# EAGLE board SwitchV1 (EAGLE 9.4.2)
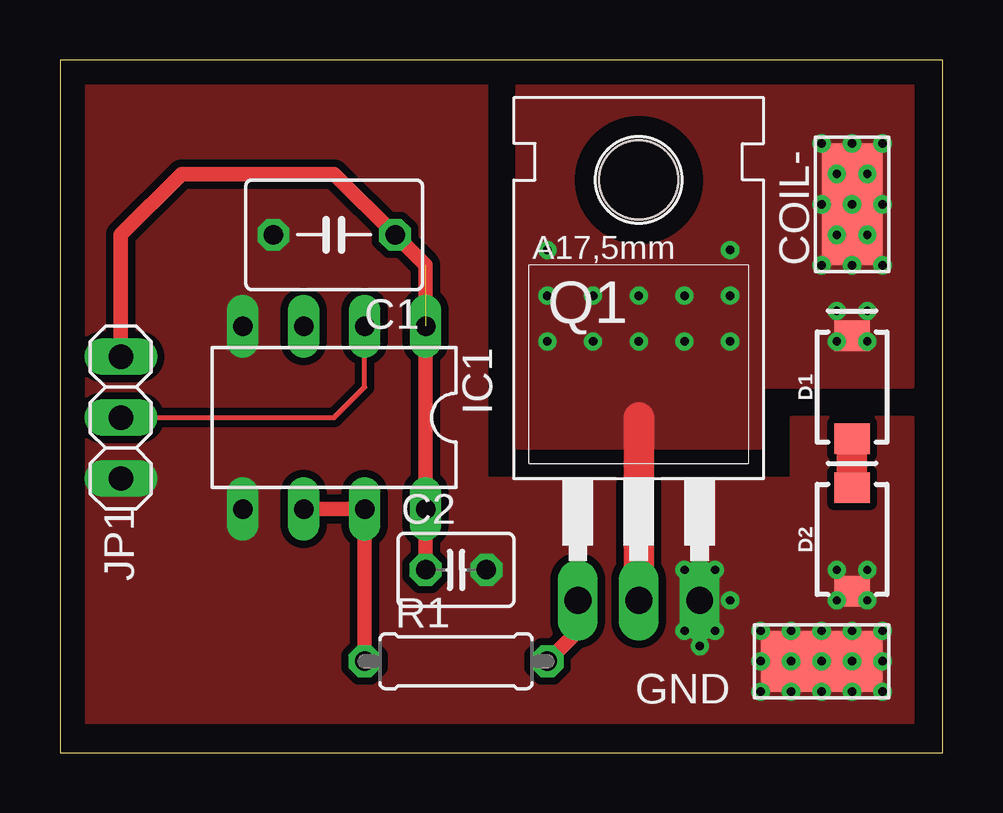
[diagram p0: board, top side]
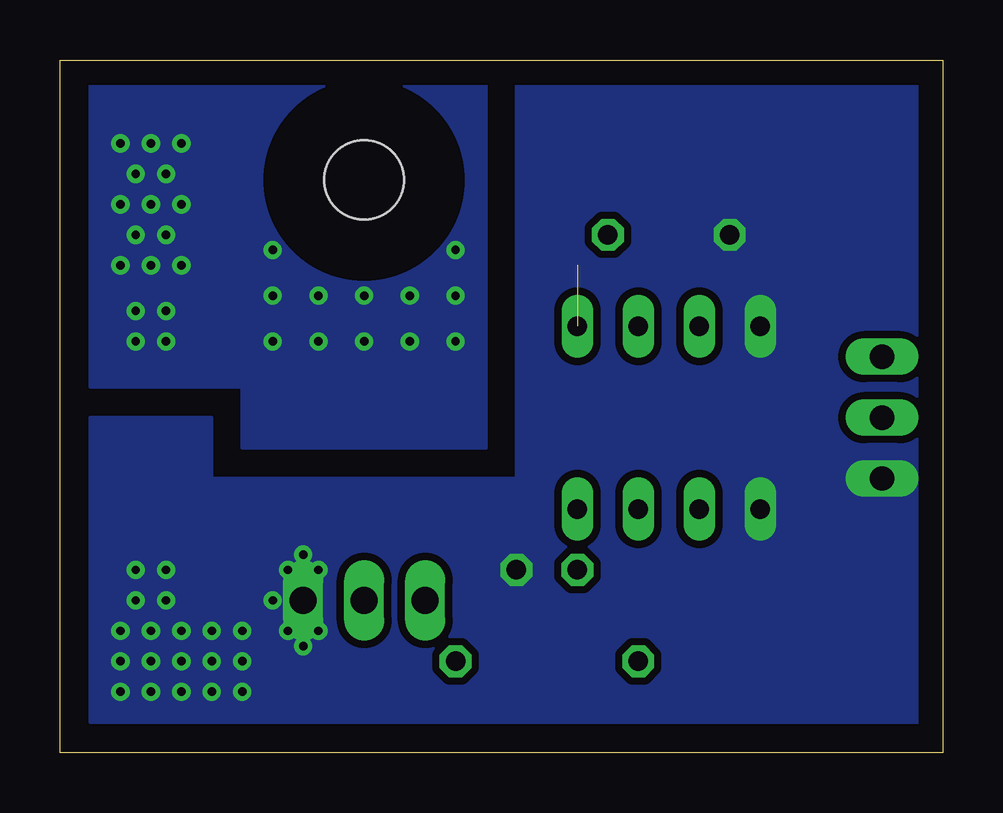
[diagram p1: board, bottom side, seen from below]

Size 36.81 x 28.88 mm. Coordinates in mm from the lower left corner, seen from the top.
Outline: 0,0 36.81,0 36.81,28.88 0,28.88 0,0
Copper layers (1*16): Top 0.035mm / dielectric 1.5mm / Bottom 0.035mm
Design rules "default *": minimum track width 6mil, minimum drill 0.35mm, track to track 12mil, track to pad 12mil, pad to pad 12mil, via to via 12mil, smd to smd 12mil, copper to edge 40mil, drill to drill 6mil, minimum pad ring 10mil, minimum via ring 8mil, stop-mask expansion 4mil, vias tented up to drill 0mil, thermal gap 10mil

## Footprints (pad centres in the part's own frame; a part is rotated, then mirrored left to right if it is on the bottom)
C050-045X075 = drill 0.813 octagon: 1 -2.54,0; 2 2.54,0
C025-030X050 = drill 0.813 octagon: 1 -1.27,0; 2 1.27,0
5-2,5 = smd 2.54 x 5.08: 1 0,0
SMA-DIODE = smd 1.27 x 1.47: A -2.15,0; C 2.15,0
DIL08 = drill 0.813 long: 1 -3.81,-3.81; 2 -1.27,-3.81; 3 1.27,-3.81; 4 3.81,-3.81; 5 3.81,3.81; 6 1.27,3.81; 7 -1.27,3.81; 8 -3.81,3.81
1X03 = drill 1.016 long: 1 -2.54,0; 2 0,0; 3 2.54,0
TO220 = drill 1.118 long: 1 -2.54,-6.35; 2 0,-6.35; 3 2.54,-6.35 | hole 3.302: 0,11.176
0207/7 = drill 0.813 octagon: 1 -3.81,0; 2 3.81,0

## Placement (x,y rotation side)
C1  1 uF film  [C050-045X075]  11.43,21.59 180 top
C2  0.1 uf ceramic  [C025-030X050]  16.51,7.62 0 top
COIL-  WIREPADSMD5-2,5  [5-2,5]  33.02,22.86 0 top
D1  DIODE-ZENERDO-214  [SMA-DIODE]  33.02,15.24 90 top
D2  DIODE-ZENERDO-214  [SMA-DIODE]  33.02,8.89 90 top
GND  WIREPADSMD5-2,5  [5-2,5]  31.75,3.81 90 top
IC1  MIC4420N  [DIL08]  11.43,13.97 180 top
JP1  [1X03]  2.54,13.97 270 top
Q1  IRF540  [TO220]  24.13,12.7 0 top
R1  1  [0207/7]  16.51,3.81 0 top

## Library data of the parts
C1 C2 = rcl; SPICEPREFIX: C
COIL- GND = wirepad
D1 D2 = sparkfun-discretesemi
IC1 = transistor-power
JP1 = pinhead
Q1 = transistor-fet
R1 = rcl; SPICEPREFIX: R

## Nets
+18V: C1.1 C2.1 IC1.1 IC1.8 JP1.1
GND: C1.2 C2.2 D2.A GND.1 IC1.4 IC1.5 JP1.3 Q1.3
N$1: IC1.6 IC1.7 R1.1
N$2: Q1.1 R1.2
N$3: D1.A D2.C
N$4: IC1.2 JP1.2
OUT: COIL-.1 D1.C Q1.2

## Tracks (layer width: path | path; a pad name or v marks a point on that pad's centre or on a via)
+18V  (1 unrouted)
  Top 0.61: JP1.1 2.54,21.59 5.08,24.13 11.43,24.13 C1.1 15.24,20.32 IC1.8 C2.1
GND  (via drill 0.35)
  other vias: 29.21,5.08 29.21,3.81 30.48,5.08 30.48,3.81 31.75,5.08 31.75,3.81 33.02,5.08 33.02,3.81 34.29,5.08 34.29,3.81 34.29,2.54 33.02,2.54 31.75,2.54 30.48,2.54 29.21,2.54 27.3,7.62 26.03,7.62 26.03,5.08 27.3,5.08 27.94,6.35 26.67,8.25 26.67,4.45 32.39,6.35 33.66,6.35 33.66,7.62 32.39,7.62
  pour Top (no thermals): 0,29.21 17.78,29.21 17.78,11.43 30.48,11.43 30.48,13.97 35.56,13.97 35.56,1.27 0,1.27
  pour Bottom (no thermals): 0,29.21 17.78,29.21 17.78,11.43 30.48,11.43 30.48,13.97 35.56,13.97 35.56,1.27 1.27,1.27 0,1.27
N$1
  Top 0.61: R1.1 IC1.7 IC1.6
N$2
  Top 0.61: R1.2 21.59,5.08 Q1.1
N$3
  Top 1.27: D1.A D2.C
N$4
  Top 0.203: IC1.2 12.7,15.24 11.43,13.97 JP1.2
OUT  (via drill 0.35)
  Top 1.27: Q1.2 24.13,13.97
  other vias: 34.29,25.4 33.02,25.4 31.75,25.4 32.39,24.13 33.66,24.13 34.29,22.86 33.02,22.86 31.75,22.86 32.39,21.59 33.66,21.59 34.29,20.32 33.02,20.32 31.75,20.32 20.32,19.05 22.23,19.05 24.13,19.05 26.03,19.05 27.94,19.05 20.32,17.14 22.23,17.14 24.13,17.14 26.03,17.14 27.94,17.14 27.94,20.96 20.32,20.96 32.39,18.42 33.66,18.42 33.66,17.14 32.39,17.14
  pour Top (no thermals): 19.05,27.94 35.56,27.94 35.56,15.24 29.21,15.24 29.21,12.7 19.05,12.7
  pour Bottom: 19.05,12.7 19.05,29.21 35.56,29.21 35.56,15.24 29.21,15.24 29.21,12.7

## Text on the board
tDocu: +18 V | SIG | GND